# Altium PCB main.PcbDoc
Units mm, origin at the board's own origin, x right, y up, seen from the top; angles counter-clockwise.
Board outline 138.18 x 44.83 mm, 2 copper layers (Top Layer, Bottom Layer); 63 components, 61 nets, 232 pads, 22 vias.
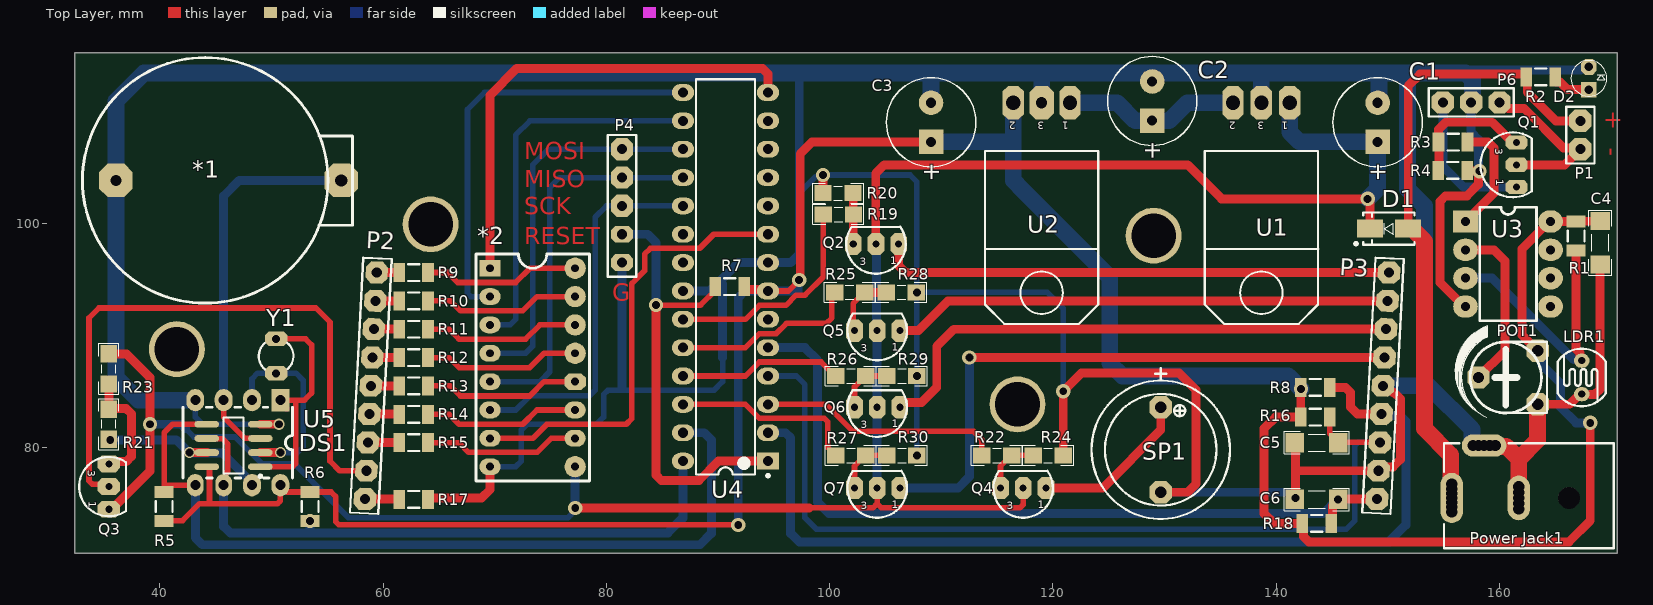
[diagram p0: Top Layer view]
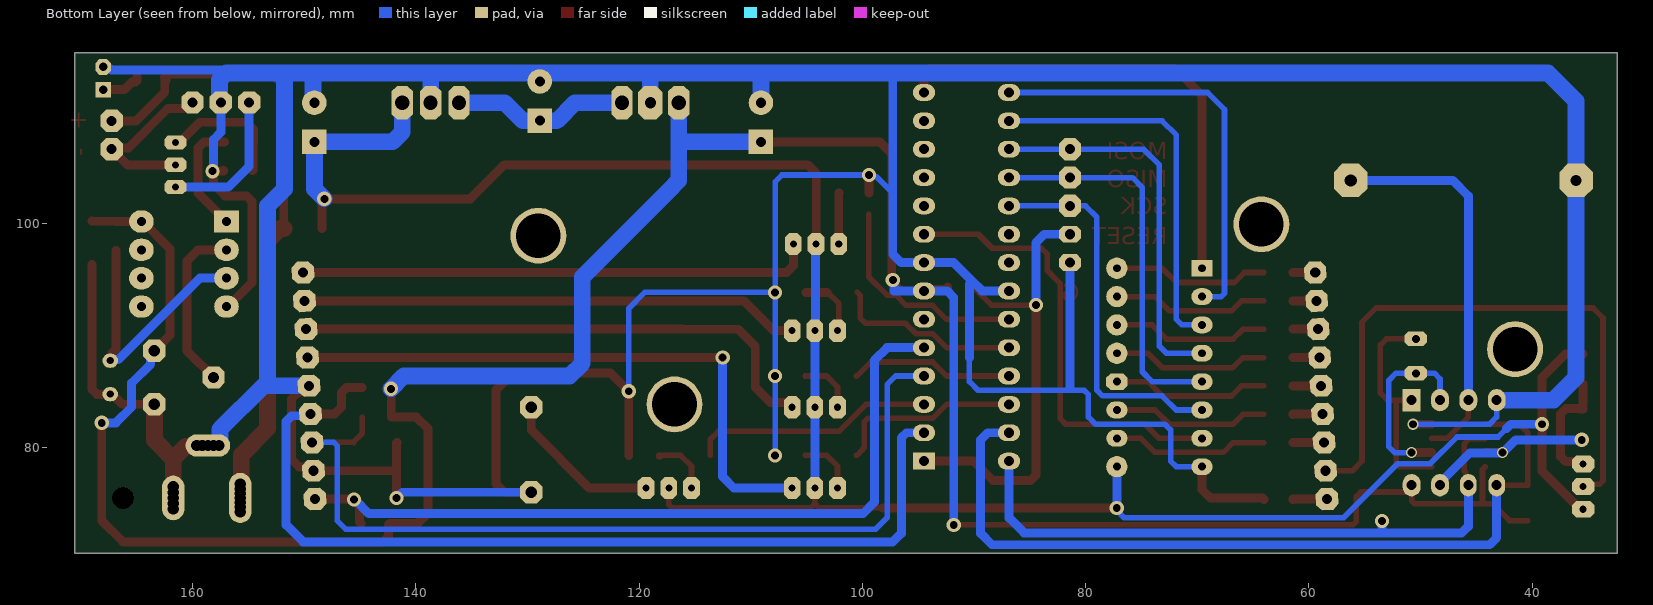
[diagram p1: Bottom Layer view, seen from below]
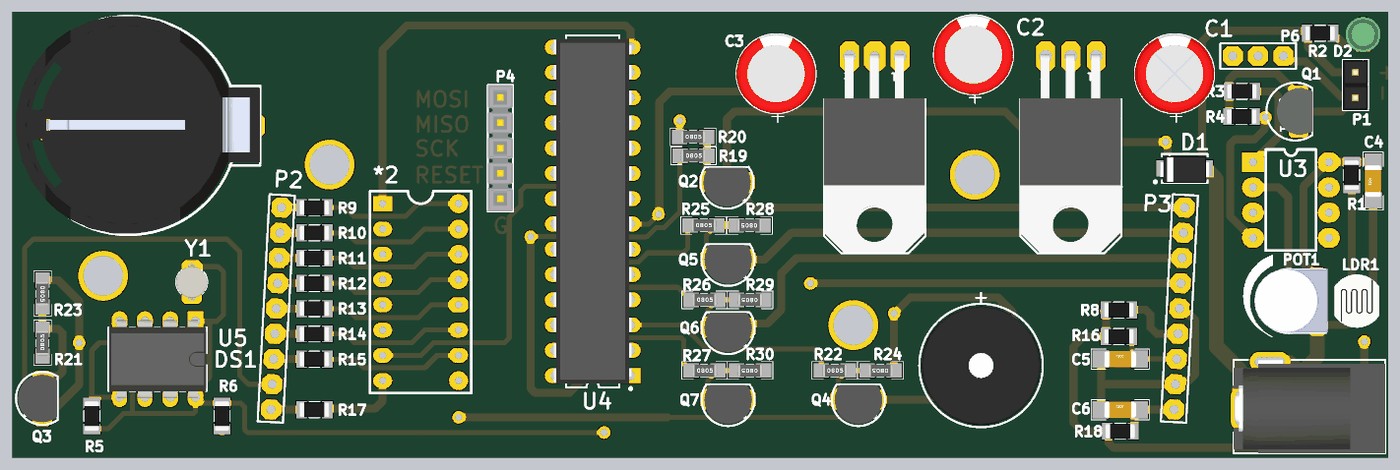
[diagram p2: 3D render of the assembled board from above, using the file's embedded part models]

## Layer stack, top to bottom
Top Solder: solder mask 0.0102, Solder Resist, Dk 3.5
Top Layer: signal copper 0.0356
Dielectric 1: dielectric 0.32, FR-4, Dk 4.8
Bottom Layer: signal copper 0.0356
Bottom Solder: solder mask 0.0102, Solder Resist, Dk 3.5

## Board outline
32.385,70.485 32.385,115.316 170.561,115.316 170.561,70.485

## Design rules (kind name [scope] priority, off if disabled: settings)
Clearance [All] p1: gap=0.254 ignorepadtopadclearanceinfootprint=FALSE except(0: Arc-Hole Track-Hole SMDPad-Hole THPad-Hole Via-Hole Fill-Hole Poly-Hole Region-Hole Text-Hole)
Height [All] p1 off: minheight=0 maxheight=25.4 prefheight=12.7
PolygonConnect [All] p1: connectstyle=Relief reliefconductorwidth=0.254 reliefentries=4 polygonreliefangle="90 Angle" airgapwidth=0.254
RoutingVias [All] p1: holewidth=0.711 width=1.27 viastyle="Through Hole" minholewidth=0.711 minwidth=1.27 maxholewidth=0.711 maxwidth=1.27
SolderMaskExpansion [All] p1: expansion=0.102 istentingtop=FALSE
Width [All] p1: maxlimit=1.5 minlimit=0.5 preferedwidth=0.8
29 further rules are at their usual default settings.

## Components (designator, comment, footprint, x,y, rotation, side; value= is the part's Value field where it differs from the comment)
*1 "BATTERY 3V 2032" batt 56.261,103.886 r180 top
*2 "ULN2003" ULN2003 69.596,96.012 r0 top
C1 "1000 μF" "WCAP-PTHT 8x11.5x3.5x0.6" 149.098,109.093 r90 top
C2 "470 μF" "WCAP-PTHT 8x8x3.5x0.6" 128.905,110.998 r90 top
C3 "470 μF" "WCAP-PTHT 8x8x3.5x0.6" 109.093,109.093 r90 top
C4 "0.1uF" CAPC4817X12N 169.037,98.298 r90 top
C5 "0.1uF" CAPC4817X12N 143.637,80.391 r0 top
C6 "0.1uF" CAPC4817X12N 143.637,75.311 r0 top
D1 "1n4007" DIOM4629X24N 150.114,99.568 r180 top
D2 "LED3MM" LED3mm_GRN 168.021,113.03 r90 top
DS1 "DS1307" DIP_8 46.99,80.391 r270 top
LDR1 "PhotoCell" PhotoCell 167.386,86.233 r90 top
P1 "Header 2" HDR1X2 167.259,109.22 r270 top
P2 "Header 9" HDR1X9 58.373,75.339 r87 top
P3 "Header 9" HDR1X9 149.051,75.339 r87 top
P4 "Header 5" HDR1X5 81.407,106.68 r270 top
P6 "Header 3" HDR1X3 154.94,110.871 r0 top
POT1 "10K" "POT 4" 160.782,86.233 r90 top
"Power Jack1" "Power Jack." "Power Jack." 166.227,75.385 r180 top
Q1 "C945" c945 161.544,105.283 r270 top
Q2 "C945" C945 104.156,98.187 r0 top
Q3 "C945" C945 35.433,76.454 r270 top
Q4 "C945" C945 117.348,76.327 r0 top
Q5 "C945" C945 104.267,90.424 r0 top
Q6 "C945" C945 104.267,83.566 r0 top
Q7 "C945" C945 104.267,76.327 r0 top
R1 "Resistor 0.25w" Resistor_SMD_1206 166.878,98.905 r90 top value=10K
R2 "Resistor 0.25w" Resistor_SMD_1206 163.703,113.157 r180 top value=1k
R3 "Resistor 0.25w" Resistor_SMD_1206 155.857,107.315 r180 top value=4.7k
R4 "Resistor 0.25w" Resistor_SMD_1206 155.829,104.775 r180 top value=10K
R5 "Resistor 0.25w" Resistor_SMD_1206 40.386,74.676 r270 top value=10K
R6 "Resistor 0.25w" Resistor_SMD_1206 53.467,74.676 r90 top value=10K
R7 "Resistor 0.25w" Resistor_SMD_1206 91.059,94.361 r0 top value=10K
R8 "Resistor 0.25w" Resistor_SMD_1206 143.51,85.344 r180 top value=10k
R9 "Resistor 0.25w" Resistor_SMD_1206 62.738,95.631 r0 top value=220R
R10 "Resistor 0.25w" Resistor_SMD_1206 62.738,93.091 r0 top value=220R
R11 "Resistor 0.25w" Resistor_SMD_1206 62.738,90.551 r0 top value=220R
R12 "Resistor 0.25w" Resistor_SMD_1206 62.738,88.011 r0 top value=220R
R13 "Resistor 0.25w" Resistor_SMD_1206 62.738,85.471 r0 top value=220R
R14 "Resistor 0.25w" Resistor_SMD_1206 62.738,82.931 r0 top value=220R
R15 "Resistor 0.25w" Resistor_SMD_1206 62.738,80.391 r0 top value=220R
R16 "Resistor 0.25w" Resistor_SMD_1206 143.51,82.677 r180 top value=10k
R17 "Resistor 0.25w" Resistor_SMD_1206 62.738,75.311 r0 top value=1K
R18 "Resistor 0.25w" Resistor_SMD_1206 143.637,73.152 r180 top value=10k
R19 "330R" RESC3413X04N 100.791,100.838 r0 top
R20 "10K" RESC3413X04N 100.758,102.743 r0 top
R21 "0R" RESC3413X04N 35.433,82.042 r90 top
R22 "2.2K" RESC3413X04N 114.982,79.248 r0 top
R23 "10K" RESC3413X04N 35.433,86.995 r270 top
R24 "10K" RESC3413X04N 119.587,79.248 r180 top
R25 "330R" RESC3413X04N 101.807,93.853 r0 top
R26 "330R" RESC3413X04N 101.901,86.36 r0 top
R27 "330R" RESC3413X04N 101.901,79.248 r0 top
R28 "10K" RESC3413X04N 106.426,93.853 r180 top
R29 "10K" RESC3413X04N 106.473,86.36 r180 top
R30 "10K" RESC3413X04N 106.473,79.248 r180 top
SP1 "" "BUZZER 7.62mm DC" 129.667,79.756 r270 top
U1 "L78XXCV" "78XXCV - Right"#1 138.684,110.843 r180 top
U2 "L78XXCV" "78XXCV - Right"#2 118.999,110.843 r180 top
U3 "LM358" DIP8E 156.972,100.203 r0 top
U4 "ATmega8A-PU" 28P3 90.678,95.25 r180 top
U5 "DS1307Z" SOIC8N_N 46.609,80.137 r180 top
Y1 "32.768KHz" "XTAL RTC" 50.419,88.138 r90 top value="12 MHz"

## Footprints (in the part's own frame and the unit in brackets; to place one, negate y for a bottom-side part, rotate by r counter-clockwise, add the part's x,y. Pads: shape width x height; smd on the part's side, far side on the other; paste and mask are expansions set on the pad)
28P3 [mm] "DIP, 28-Leads, Row Spacing 7.62mm, Pitch 2.54mm, Body 34.67x7.3mm"
  rect 2x1.5 hole 0.9: 1(-3.81,16.51)
  oval 2x1.5 hole 0.9: 2(-3.81,13.97) 3(-3.81,11.43) 4(-3.81,8.89) 5(-3.81,6.35) 6(-3.81,3.81) 7(-3.81,1.27) 8(-3.81,-1.27) 9(-3.81,-3.81) 10(-3.81,-6.35) 11(-3.81,-8.89) 12(-3.81,-11.43) 13(-3.81,-13.97) 14(-3.81,-16.51) 15(3.81,-16.51) 16(3.81,-13.97) 17(3.81,-11.43) 18(3.81,-8.89) 19(3.81,-6.35) 20(3.81,-3.81) 21(3.81,-1.27) 22(3.81,1.27) 23(3.81,3.81) 24(3.81,6.35) 25(3.81,8.89) 26(3.81,11.43) 27(3.81,13.97) 28(3.81,16.51)
  silkscreen extent -3.94,-17.7 2.65,17.93, body extent -3.95,-17.35 3.95,17.3, height 5.04
"78XXCV - Right"#1 [mm] "Right Angle"
  oct 1.905x3 hole 1.27: 1(-2.54,0) 2(2.54,0) 3(0,0)
  silkscreen extent -5.11,4.32 5.08,19.81, body extent -5.03,-0.2 5.13,19.71, height 4.44
"78XXCV - Right"#2 [mm] "Right Angle"
  oct 1.905x3 hole 1.27: 1(-2.54,0) 2(2.54,0)
  oct 2.2x3 hole 1: 3(0,0)
  silkscreen extent -5.11,4.32 5.08,19.81, body extent -5.03,-0.2 5.13,19.71, height 4.44
batt [mm]
  oct 3x3 hole 1.1: 1(0,0)
  oct 3x3 hole 1: 2(20.193,0)
  silkscreen extent -1.02,-11 23.19,11, body extent -0.98,-11.07 23.52,10.93, height 8.5
"BUZZER 7.62mm DC" [mm] "BUZZER 12mm DIA , 7.62mm pitch DESIGNER ABBAS BASEREH"
  oct 2x2 hole 1: 1(-3.81,0) 2(3.81,0)
  silkscreen extent -7.3,-6.2 6.2,6.2, body extent -6,-6 6,6, height 9.5
c945 [mm] "NPN Transistor"
  oct 1.27x2 hole 0.635: 1(2,0) 2(0,0) 3(-2,0)
  silkscreen extent -2.91,-3.23 2.91,1.37, body extent -2.4,-2.18 2.36,1.45, height 9.82
C945 [mm] "NPN Transistor"
  oct 1.5x2 hole 0.635: 1(2.032,0) 2(0,0) 3(-2.032,0)
  silkscreen extent -2.66,-2.66 2.66,1.54, body extent -2.39,-2.45 2.41,1.48, height 8
CAPC4817X12N [mm] "Chip Capacitor, 2-Leads, Body 4/80x1/70mm, IPC Medium Density-Design:Abbas Basereh"
  rect 1.65x1.75 smd: 1(-1.95,0) 2(1.95,0)
  silkscreen extent -2.92,-1.02 2.92,1.02, body extent -1.6,-0.8 1.6,0.8, height 1
DIOM4629X24N [mm] "Molded Diode, 2-Leads, Body 4/60x2/90mm, IPC Medium Density-Design:Abbas Basereh"
  rect 2.3x1.6 smd: 1(-1.7,0) 2(1.7,0)
  silkscreen extent -2.3,-1.45 3.07,1.47, body extent -2.5,-1.22 2.5,1.48, height 2.2
DIP8E [mm]
  rect 2.2x2 hole 0.8: 1(0,0)
  oval 2.2x2 hole 0.8: 2(0,-2.54) 3(0,-5.08) 4(0,-7.62) 5(7.62,-7.62) 6(7.62,-5.08) 7(7.62,-2.54) 8(7.62,0)
  silkscreen extent 1.27,-8.89 6.35,1.27
DIP_8 [mm]
  rect 2x1.6 hole 0.9: 1(-3.81,3.81)
  oval 2x1.6 hole 0.9: 2(-3.81,1.27) 3(-3.81,-1.27) 4(-3.81,-3.81) 7(3.81,1.27) 8(3.81,3.81)
  oval 2x1.5 hole 0.9: 5(3.81,-3.81) 6(3.81,-1.27)
  silkscreen extent -3.18,-4.9 3.18,4.9, body extent -3.94,-4.89 3.93,4.89, height 3.76
HDR1X2 [mm] "Connector; Header; 2 Position"
  oct 2x2 hole 0.9: 1(0,0) 2(2.54,0)
  silkscreen extent -1.27,-1.27 3.81,1.27, body extent -1.27,-1.28 3.81,1.26, height 8.79
HDR1X3 [mm] "Connector; Header; 3 Position"
  oct 2x2 hole 0.9: 1(0,0) 2(2.54,0) 3(5.08,0)
  silkscreen extent -1.27,-1.27 6.35,1.27
HDR1X5 [mm] "Connector; Header; 5 Position"
  oct 2x2 hole 0.9: 1(0,0) 2(2.54,0) 3(5.08,0)
  oct 1.5x2 hole 0.9: 4(7.62,0) 5(10.16,0)
  silkscreen extent -1.27,-1.27 11.43,1.27, body extent -1.28,-1.27 11.42,1.27, height 8.38
HDR1X9 [mm] "Connector; Header; 9 Position"
  oct 2x2 hole 0.9: 1(0,0) 2(2.54,0) 3(5.08,0) 4(7.62,0) 5(10.16,0) 6(12.7,0) 7(15.24,0) 8(17.78,0) 9(20.32,0)
  silkscreen extent -1.27,-1.27 21.59,1.27
LED3mm_GRN [mil]
  rect 55x55 hole 30: 1(-40,0)
  oct 55x55 hole 30: 2(40,0)
  silkscreen extent -63,-63 63,63, body extent -69,-69 69,69, height 154
PhotoCell [mm]
  oval 1.27x1.397 hole 0.635: 1(-1.5,0) 2(1.5,0)
  silkscreen extent -2.58,-2.15 2.58,2.15, body extent -2.61,-2.16 2.61,2.14, height 2.44
"POT 4" [mm] "Trimmer"
  oct 2x2 hole 1.016: 1(-2.4,-2.65) 2(2.4,-2.65) 3(0,2.65)
  silkscreen extent -3.58,-3.5 4.61,4.75, body extent -3.17,-3.66 3.23,3.69, height 4.75
"Power Jack." [mm]
  round 1.5 hole 1: 1(10.484,-1.303) 1(10.484,-0.853) 1(10.484,-0.453) 1(10.484,0.347) 1(10.484,0.747) 1(10.484,1.197) 2(4.484,-1.053) 2(4.484,0.947) 2(4.484,-0.553) 2(4.484,0.447) 3(6.584,-4.753) 3(7.084,-4.753) 3(8.084,-4.753) 3(8.584,-4.753)
  oval 2x4.5 hole 1: 1(10.484,-0.053)
  oval 2x4 hole 1: 2(4.484,-0.053)
  oval 4x2 hole 1: 3(7.584,-4.753)
  round 1.9 hole 2: MH(-0.016,-0.053)
  silkscreen extent -4.02,-4.95 11.18,4.45, body extent -4.02,-4.95 11.18,4.45, height 11
RESC3413X04N [mm] "Chip Resistor, 2-Leads, Body 3/40x1/30mm, IPC Medium Density-Design:Abbas Basereh"
  rect 1.55x1.45 smd: 1(-1.35,0) 2(1.35,0)
  silkscreen extent -2.29,-0.89 2.29,0.89, body extent -1.25,-0.62 1.25,0.62, height 0.79
Resistor_SMD_1206 [mm]
  rect 1.05x1.7 smd: 1(-1.298,0) 2(1.298,0)
  silkscreen extent -0.5,-0.75 0.5,0.75, body extent -1.52,-0.76 1.52,0.76, height 0.6
SOIC8N_N [mm] "SOIC, 8-Leads, Body 4.9x3.9mm, Pitch 1.27mm, IPC Medium Density"
  oval 2.2x0.6 smd: 1(-2.4,1.905) 2(-2.4,0.635) 3(-2.4,-0.635) 4(-2.4,-1.905) 5(2.4,-1.905) 6(2.4,-0.635) 7(2.4,0.635) 8(2.4,1.905)
  silkscreen extent -2.53,-2.5 0.9,2.88, body extent -2,-2.5 2,2.5, height 1.75
ULN2003 [mil]
  rect 75x59.06 hole 28: 1(-0.24,0.23)
  oval 75x59.06 hole 28: 2(-0.24,-99.77) 3(-0.24,-199.77) 4(-0.24,-299.77) 5(-0.24,-399.77) 6(-0.24,-499.77) 7(-0.24,-599.77) 8(-0.24,-699.77) 10(299.76,-599.77) 11(299.76,-499.77)
  round 75 hole 28: 9(299.76,-699.77) 13(299.76,-299.77) 14(299.76,-199.77) 15(299.76,-99.77) 16(299.76,0.23)
  oct 75x59.06 hole 28: 12(299.76,-399.77)
  silkscreen extent -50,-750 350,50
"WCAP-PTHT 8x8x3.5x0.6" [mm] "Polarized capacitors, Aluminum Polymer Capacitors, 2-Leads, Body 8x8x3.5x0.6"
  rect 2.2x2.2 hole 0.9: 1(-1.75,0)
  round 2.2 hole 0.9: 2(1.75,0)
  silkscreen extent -4,-4 4,4, body extent -3.97,-3.98 3.99,3.99, height 8.21
"WCAP-PTHT 8x11.5x3.5x0.6" [mm] "Polarized capacitors, Aluminum Polymer Capacitors, 2-Leads, Body 8x11.5x3.5x0.6"
  rect 2.2x2.2 hole 0.9: 1(-1.75,0)
  round 2.2 hole 0.9: 2(1.75,0)
  silkscreen extent -4,-4 4,4, body extent -3.97,-3.98 3.99,4, height 11.71
"XTAL RTC" [mm] "Crystal Oscillator"
  oct 1.3x2 hole 0.7: 1(-1.55,0) 2(1.55,0)
  silkscreen extent -1.17,-1.55 1.19,1.55, body extent -1.73,-1.6 1.72,1.6, height 8.98

## Part data
C1: library part "WCAP-PTHT 8x11.5x3.5x0.6 870135174006", "WCAP-PTHT Aluminum Polymer Capacitors , 1000 μF; + / - 20%; 6,3 V , 8 x 11,5", Manufacturer="Wurth Elektronik", partNo=870135174006, Application="Low voltage port filtering, appplid to high-end switching power supply, PC(desktop,laptop ),industrial computer, VGA card, server power, charger, TV, digital set-top box,DC-DC power module, game machine etc which consume large current with high speed circuit.", Capacitance="1000 μF", Characteristics="Aluminum Polymer Capacitors;Recommended soldering: Wave;Operating temperature: –55 °C to +125 °C;+125 °C product series;Low ESR at high frequency range;Long life: 2000 h @ +125 °C", ComponentLink1Description=Manufacturer, ComponentLink1URL=http://www.we-online.com, ComponentLink2Description=Datasheet, ComponentLink2URL=http://katalog.we-online.de/pbs/datasheet/870135174006.pdf, Created by="Karrer Zheng", Created Date=5/13/2015, E-mail=libraries@we-online.com
C2 C3: library part "WCAP-PTHT 8x8x3.5x0.6 870135174002", "WCAP-PTHT Aluminum Polymer Capacitors , 470 μF; + / - 20%; 6,3 V , 8 x 8", Manufacturer="Wurth Elektronik", partNo=870135174002, Application="Low voltage port filtering, appplid to high-end switching power supply, PC(desktop,laptop ),industrial computer, VGA card, server power, charger, TV, digital set-top box,DC-DC power module, game machine etc which consume large current with high speed circuit.", Capacitance="470 μF", Characteristics="Aluminum Polymer Capacitors;Recommended soldering: Wave;Operating temperature: –55 °C to +125 °C;+125 °C product series;Low ESR at high frequency range;Long life: 2000 h @ +125 °C", ComponentLink1Description=Manufacturer, ComponentLink1URL=http://www.we-online.com, ComponentLink2Description=Datasheet, ComponentLink2URL=http://katalog.we-online.de/pbs/datasheet/870135174002.pdf, Created by="Karrer Zheng", Created Date=5/13/2015, E-mail=libraries@we-online.com
C4 C5 C6: library part "CAP SMD 1206", "CAP 1206", Data=16-12-2016, Desc.="CAP SMD 1206", Designer="Abbas Basereh"
D1: library part "1n4007 SMD M7", "Standard Rectifiers", Manufacturer="DC COMPONENTS", Data=16-12-2016, Designer="Abbas Basereh", Link=http://www.tme.eu/en/details/m7/smd-universal-diodes/dc-components/, Part. No=M7
D2: library part "LED 3MM", "Light Emitting Diode", Designer="Ali Hafizi"
DS1: library part DS1307., LatestRevisionDate=17-Jul-2002, LatestRevisionNote="Re-released for DXP Platform.", Publisher="Altium Limited"
LDR1: library part LDR, "Photo Cell- Variable Resistor With Light", Company="IPA CO.", Designer="Saeid Jorablo", Last Update Time=2008/07/17
P1: "Header, 2-Pin", LatestRevisionDate=17-Jul-2002, LatestRevisionNote="Re-released for DXP Platform.", Publisher="Altium Limited"
P2 P3: "Header, 9-Pin", LatestRevisionDate=17-Jul-2002, LatestRevisionNote="Re-released for DXP Platform.", Publisher="Altium Limited"
P4: "Header, 5-Pin", LatestRevisionDate=17-Jul-2002, LatestRevisionNote="Re-released for DXP Platform.", Publisher="Altium Limited"
P6: "Header, 3-Pin", LatestRevisionDate=17-Jul-2002, LatestRevisionNote="Re-released for DXP Platform.", Publisher="Altium Limited"
POT1: library part POT, "Variable Resistor"
Q1: "NPN Silicon Epitaxial Planar Transistor", ComponentLink1Description="Manufacturer Link", ComponentLink1URL=http://www.taitroncomponents.com/, ComponentLink2Description=Datasheet, ComponentLink2URL=http://www.taitroncomponents.com/, DatasheetVersion=2017, LatestRevisionDate=2017, LatestRevisionNote="IPC-7351 Footprint Added.", PackageDescription="3-Pin SOT-23 Package 0.95 mm Pitch, 2.3 mm Lead Span", PackageReference=SOT23, PackageVersion=2017-2-8, Published=2017-2-8, Publisher="Abbas Basereh"
Q2 Q3 Q4 Q5 Q6 Q7: "NPN Transistor", Company="IPA CO", Designer="Saeid Jorablo", Last Update Time=2008/08/04
R1 R2 R3 R4 R5 R6 R7 R8 R9 R10 R11 R12 R13 R14 R15 R16 R17 R18: library part Resistor, LatestRevisionDate=17-Jul-2002, LatestRevisionNote="Re-released for DXP Platform.", Publisher="Altium Limited"
R19 R20 R21 R22 R23 R24 R25 R26 R27 R28 R29 R30: library part "RES 0805 0.125W", "RES 0805", Data=16-12-2016, Desc.="RES SMD 0805", Designer="Abbas Basereh"
SP1: library part "PIEZO BUZZER", "PIEZO BUZZER ACTIVE", Comment_1="SPEAKER AND BEEP", ComponentLink2Description=Reference, Design Date=1395/11/14, Designer="Abbas Basereh", Mounting Technology=THD, PackageDescription=THD, Pin Count=2, Publisher="Abbas Basereh", Status=Unreleased
U1 U2: "Fixed Voltage Regulator", Adding Date=1387/01/06, Company=ControTec, Designer="Saeid Jorablo"
U3: library part 1458
U4: "8-bit AVR Microcontroller, 8KB Flash, 512 Bytes EEPROM, 1KB SRAM, 28-pin PDIP, Industrial Grade (-40°C to 85°C)", Supplier Part Number 1=ATMEGA8A-PU-ND, ComponentLink1Description="Manufacturer Link", ComponentLink1URL=http://www.atmel.com/products/avr/default.asp?, ComponentLink2Description="ATmega8A Datasheet", ComponentLink2URL=http://www.atmel.com/dyn/resources/prod_documents/doc8159.pdf, ComponentLink3Description="ATmega8A Summary", ComponentLink3URL=http://www.atmel.com/dyn/resources/prod_documents/8159S.pdf, ComponentLink4Description="Atmel.com Home", ComponentLink4URL=http://www.atmel.com, DatasheetVersion=2017-1-5, PackageDescription="28-lead (0.300\"/7.62mm Wide) Plastic Dual Inline Package (PDIP)", PackageReference=28P3, PackageVersion=2017-1-5, Published=2017-1-5, Publisher="Abbas Basereh", Supplier 1=Digi-Key, Supplier 2=Farnell, Supplier 3=Mouser, Supplier Part Number 2=1748534, Supplier Part Number 3=556-ATMEGA8A-PU
U5: "64 X 8 Serial Real-Time Clock", Code_IPC=SOIC127P600-8, ComponentLink1Description="Manufacturer Link", ComponentLink1URL=http://www.maxim-ic.com/, ComponentLink2Description=Datasheet, ComponentLink2URL=http://pdfserv.maxim-ic.com/en/ds/DS1307.pdf, ComponentLink3Description="Discontinuation Notice", ComponentLink3URL=http://www.maxim-ic.com/qa/pdfs/non-obsolescence-letter.pdf, DatasheetVersion=10-Aug-1999, LatestRevisionDate=13-Apr-2006, LatestRevisionNote="IPC-7351 Footprint Added.", PackageDescription="8-Pin Small Outline Integrated Circuit 1.27 mm Pitch", PackageReference=SOIC8N, PackageVersion=1999, Published=13-Oct-2000, Publisher="Altium Limited"
Y1: library part XTAL, "XTAL Crystal", ComponentLink1Description=Datasheet, ComponentLink2Description=Reference, Design Date=2017-1-3, Designer="ABBAS BASEREH", Mounting Technology="Surface Mount\Through-Hole", Status=Unreleased

## Free pads (board coordinates)
  round 5 hole 4: 2(41.529,88.773) 2(64.262,99.949) 2(116.84,83.82) 2(129.032,98.933)

## Via types
v1: diameter 1.27, hole 0.711, Top Layer to Bottom Layer, 19 vias
v2: diameter 1, hole 0.711, Top Layer to Bottom Layer, 3 vias

## Nets (pads, with @x,y where several pads share a name; then routed paths per layer and width w, separated by ;. In a path a pad name is that pad's centre, name@x,y a point inside that pad or via, vN(x,y) a via of type N, cw(c..) or ccw(c..) an arc to the next point about the centre after c; other vN are vias at no path point)
2: P3.4 R8.1 U4.2 | length 85.4
  Top Layer w0.8: R8.1@144.822,85.33 R8.1 146.216,85.344 146.685,84.875 146.685,83.566 147.303,82.948 P3.4 P3.4@149.141,83.257
  Bottom Layer w0.8: U4.2 96.051,81.28 96.52,80.811 96.52,72.263 97.282,71.501 150.114,71.501 151.638,73.025 151.638,82.296 151.13,82.804 149.594,82.804 P3.4
12V: *2.9 C1.1 D1.2 Q2.2 Q3.1 Q4.2 Q5.2 Q6.2 Q7.2 R23.1 U1.1 | length 200.3
  Top Layer w0.5: 98.156,74.549 103.886,74.549 104.267,74.93 ; Q7.2 104.267,74.93 ; Q4.2 117.348,74.842 117.055,74.549 104.648,74.549 104.267,74.93
  Top Layer w0.8: Q3.1 35.701,74.422 39.116,77.837 v1(39.116,82.042) 39.116,86.233 37.004,88.345 R23.1 ; v1(77.216,74.549) 98.156,74.549 ; Q2.2@104.14,98.171 104.14,104.521 104.902,105.283 132.075,105.283 135.123,102.235 v1(148.209,102.235) 148.209,102.108 148.414,101.903 D1.2
  Bottom Layer w0.5: 42.291,81.661 43.053,80.899 46.736,80.899 49.137,78.498 52.058,78.498 56.896,73.66 76.561,73.66 76.853,73.953 76.853,73.978 77.216,74.341 v1(77.216,74.549)
  Bottom Layer w0.8: v1(39.116,82.042) 41.91,82.042 42.291,81.661 ; *2.9 77.21,74.555 v1(77.216,74.549) ; Q2.2@104.14,98.171 104.203,98.108 104.203,90.487 Q5.2 Q6.2 Q7.2
  Bottom Layer w1.5: U1.1 141.224,108.222 142.103,107.343 C1.1 149.098,103.124 v1(148.209,102.235)
12V1: "Power Jack1.1" D1.1 P1.1 R2.2 | length 57.5
  Top Layer w0.8: D1.1 151.842,99.596 151.842,112.345 152.908,113.411 162.28,113.411 R2.2@162.53,113.161 ; R2.2@162.405,112.832 R2.2 162.5,113.062 162.5,111.78 164.592,109.689 165.061,109.22 P1.1
  Top Layer w1.5: D1.1 152.164,99.568 153.289,98.443 153.289,81.658 155.647,79.3 155.647,76.688 155.647,76.238 155.647,75.534 155.743,75.438
A: *2.1 U4.14 | length 43.4
  Top Layer w0.8: *2.1 69.59,111.514 71.995,113.919 93.98,113.919 94.488,113.411 U4.14 U4.14@94.361,111.887
AO: *2.16 R9.2 | length 14.1
  Top Layer w0.5: R9.2 65.786,95.631 66.675,94.742 71.882,94.742 73.158,96.018 *2.16
AR: C5.2 P3.3 R16.1 U4.4 | length 81
  Top Layer w0.5: R16.1 144.808,81.22 145.587,80.441 C5.2 145.608,80.412 P3.3
  Bottom Layer w0.5: U4.4 97.028,86.36 97.79,85.598 97.79,73.66 98.806,72.644 146.304,72.644 147.066,73.406 147.066,80.119 147.359,80.412 P3.3
B: *2.2 U4.15 | length 38.5
  Bottom Layer w0.5: *2.2 67.857,93.478 67.564,93.771 67.564,110.236 69.088,111.76 U4.15
BO: *2.15 R10.2 | length 14.1
  Top Layer w0.5: R10.2 66.04,93.091 66.939,92.192 72.507,92.192 73.793,93.478 *2.15
BR: C6.2 P3.1 R18.1 U4.5 | length 71.1
  Top Layer w0.8: R18.1 145.06,73.277 145.06,74.734 145.542,75.216 v1(145.542,75.311) 145.556,75.325 149.037,75.325 P3.1
  Bottom Layer w0.8: U4.5 97.79,88.9 98.933,87.757 98.933,75.057 99.949,74.041 144.217,74.041 145.487,75.311 v1(145.542,75.311)
BUZZER: R22.1 U4.3 | length 21.9
  Top Layer w0.5: U4.3 99.681,83.82 102.094,81.407 112.903,81.407 113.632,80.678 R22.1
BUZZEROUT: Q4.1 SP1.1 | length 14.5
  Top Layer w0.8: Q4.1 124.46,76.327 129.667,81.534 SP1.1
C: *2.3 U4.16 | length 34.5
  Bottom Layer w0.5: *2.3 71.38,90.938 71.882,91.44 71.882,107.95 73.152,109.22 U4.16
C1: P3.9 Q2.1 | length 46.1
  Top Layer w0.8: Q2.1@106.172,98.171 106.172,96.266 106.807,95.631 115.697,95.631 P3.9
C2: P3.8 Q5.1 | length 44.8
  Top Layer w0.8: Q5.1 107.95,90.424 110.62,93.094 P3.8
C3: P3.7 Q6.1 | length 48.6
  Top Layer w0.8: Q6.1 106.299,83.641 106.649,83.991 108.249,83.991 109.601,85.343 109.601,89.027 111.125,90.551 116.078,90.551 116.085,90.558 P3.7
C4: P3.6 Q7.1 | length 54.6
  Top Layer w0.8: v1@112.405,88.021 P3.6
  Bottom Layer w0.8: Q7.1 111.506,76.327 112.522,77.343 v1(112.522,88.011)
CO: *2.14 R11.2 | length 14.1
  Top Layer w0.5: R11.2 65.913,90.551 66.802,89.662 72.771,89.662 74.047,90.938 *2.14
COM1: R19.1 U4.23 | length 19.7
  Top Layer w0.5: U4.23 92.465,91.44 93.719,92.694 96.091,92.694 97.008,93.611 97.802,93.611 99.441,95.25 R19.1
COM2: R25.1 U4.24 | length 16.8
  Top Layer w0.5: U4.24 92.456,88.9 93.71,90.154 95.225,90.154 96.142,91.071 99.707,91.071 100.203,91.567 100.203,93.599 R25.1
COM3: R26.1 U4.25 | length 14.7
  Top Layer w0.5: U4.25 92.456,86.36 93.71,87.614 99.247,87.614 100.501,86.36 R26.1
COM4: R27.1 U4.26 | length 17
  Top Layer w0.5: U4.26 92.465,83.82 93.719,82.566 99.529,82.566 99.822,82.273 99.822,79.977 100.026,79.773 100.026,79.723 100.501,79.248 R27.1
COMR: "Power Jack1.2" "Power Jack1.3" *1.2 *2.8 C1.2 C2.2 C3.2 C4.1 C5.1 C6.1 D2.2 DS1.4 LDR1.1 P3.2 P3.5 P4.5 P6.2 POT1.1 R4.1 R17.2 R20.1 R24.1 R28.1 R29.1 R30.1 SP1.2 U1.3 U2.3 U3.4 U4.8 U4.22 U5.4 | length 488.9
  Top Layer w0.8: U5.4 v2(50.673,82.042) ; R17.2 64.036,75.313 64.161,75.438 68.834,75.438 69.59,76.194 *2.8 ; R20.1 99.412,102.747 99.412,104.365 v1(99.416,104.369) ; R24.1 v1(120.937,84.996) 122.555,86.614 131.318,86.614 132.842,85.09 132.842,76.708 132.08,75.946 SP1.2 ; C5.1 141.732,80.346 141.732,78.105 ; v1(141.732,75.438) 141.732,78.105 ; P3.5 149.873,85.485 150.489,84.87 150.588,84.87 151.15,84.308 151.15,78.887 150.472,78.209 149.517,78.209 P3.2 141.962,77.875 141.732,78.105 ; 156.083,93.345 154.693,94.735 154.693,102.02 155.162,102.489 157.099,102.489 158.133,103.523 158.133,104.622 v1(158.223,104.712) 158.191,104.743 157.258,104.743 R4.1@157.226,104.775 ; POT1.1 166.295,83.833 167.195,84.733 LDR1.1 ; 168.148,84.709 168.568,84.709 169.037,85.178 C4.1
  Top Layer w1.5: 158.643,80.138 158.739,80.042 160.623,80.042 161.743,78.922 ; 161.743,75.438 161.743,76.438 161.743,78.922 ; POT1.1 163.432,80.611 161.743,78.922
  Bottom Layer w0.5: DS1.4 43.18,82.677 43.815,82.042 v2(50.673,82.042) ; *2.8 71.888,78.238 72.39,78.74 72.39,81.534 72.898,82.042 79.121,82.042 79.756,82.677 79.756,84.709 80.137,85.09 81.407,85.09 89.662,85.09 90.424,85.852 90.424,88.011 ; 97.282,102.743 98.761,104.222 99.269,104.222 v1(99.416,104.369) 107.213,104.369 107.823,103.759 v1(107.823,93.853) ; v1(107.823,79.248) v1(107.823,86.36) v1(107.823,93.853) ; v1(120.937,84.996) 120.937,92.423 119.507,93.853 v1(107.823,93.853)
  Bottom Layer w0.8: 81.407,85.344 P4.5 ; U4.22 89.281,93.98 90.17,94.869 ; 90.424,88.011 90.424,94.615 90.17,94.869 ; 97.282,113.514 97.282,102.743 97.282,97.282 96.52,96.52 U4.8 91.821,96.52 90.17,94.869 ; SP1.2 141.224,75.946 v1(141.732,75.438) v1@141.605,75.438 ; 156.968,113.514 157.246,113.792 167.285,113.792 167.355,113.862 167.837,113.862 D2.2 ; P6.2 157.48,108.204 158.133,107.551 158.133,104.801 v1(158.223,104.712)
  Bottom Layer w1.5: *1.2 36.068,86.233 38.1,84.201 DS1.4 ; *1.2@36.068,104.14 36.068,110.998 38.584,113.514 97.282,113.514 109.093,113.514 118.999,113.514 138.811,113.514 ; C3.2 109.093,113.387 ; U2.3 118.999,113.387 ; U1.3 138.684,113.387 138.811,113.514 ; C1.2 149.232,110.977 149.232,113.514 ; P3.5 153.656,85.485 ; P6.2@157.607,111.76 157.607,112.875 156.968,113.514 151.765,113.514 ; 157.643,80.138 158.143,80.138 158.643,80.138 ; 157.778,80.138 157.547,80.369 157.547,81.594 153.656,85.485 ; 138.811,113.514 149.232,113.514 ; 149.232,113.514 151.765,113.514 ; 151.765,113.514 151.765,103.124 153.289,101.6 153.289,85.852 153.656,85.485
D: *2.4 P4.1 U4.17 | length 34.4
  Bottom Layer w0.5: *2.4 72.777,88.398 73.406,89.027 73.406,105.283 74.803,106.68 P4.1 U4.17
DO: *2.13 R12.2 | length 14.1
  Top Layer w0.5: R12.2 65.913,88.011 66.812,87.112 73.142,87.112 74.428,88.398 *2.13
DOT: DS1.7 R21.1 U5.7 | length 16
  Top Layer w0.8: v2(42.672,79.502) U5.7
  Bottom Layer w0.8: v1(35.56,80.645) 41.475,80.645 42.618,79.502 v2(42.672,79.502) 42.71,79.464 45.577,79.464 48.26,76.781 DS1.7
DOTO: P2.2 Q3.2 | length 55.1
  Top Layer w0.5: Q3.2 35.218,76.669 33.948,76.669 33.655,76.962 33.655,91.567 34.544,92.456 53.975,92.456 55.245,91.186 55.245,78.74 56.11,77.875 P2.2
E: *2.5 P4.2 U4.18 | length 34.5
  Bottom Layer w0.5: *2.5 74.047,85.858 74.93,86.741 74.93,103.251 75.819,104.14 P4.2 U4.18
EO: *2.12 R13.2 | length 14.1
  Top Layer w0.5: R13.2 66.04,85.471 66.939,84.572 73.142,84.572 74.428,85.858 *2.12
F: *2.6 P4.3 U4.19 | length 33.9
  Bottom Layer w0.5: *2.6 71.888,83.318 73.152,84.582 78.486,84.582 78.994,85.09 78.994,100.584 80.01,101.6 P4.3 U4.19
FO: *2.11 R14.2 | length 14.1
  Top Layer w0.5: R14.2 65.913,82.931 66.802,82.042 72.517,82.042 73.793,83.318 *2.11
G: *2.7 U4.9 | length 40.4
  Top Layer w0.5: *2.7 73.412,80.778 74.676,82.042 81.788,82.042 82.296,82.55 82.296,94.651 83.439,95.794 83.439,97.282 83.947,97.79 87.519,97.79 87.535,97.806 88.372,97.806 89.626,99.06 U4.9
GO: *2.10 R15.2 | length 14.1
  Top Layer w0.5: R15.2 66.802,80.391 67.669,79.524 73.809,79.524 75.063,80.778 *2.10
LDR: LDR1.2 R1.1 U3.3 | length 23.6
  Top Layer w0.8: R1.1 166.878,88.773 167.233,88.418 167.233,87.886 LDR1.2
  Bottom Layer w0.8: U3.3 159.367,95.123 166.667,87.823 167.296,87.823 LDR1.2
NetC2_1: C2.1 U1.2 U2.1 | length 15.9
  Bottom Layer w1.5: U2.1 125.758,110.843 127.381,109.22 128.905,109.22 130.429,109.22 132.052,110.843 U1.2
NetD2_1: D2.1 R2.1 | length 3.7
  Top Layer w0.8: R2.1 165.001,112.832 165.126,112.707 165.423,112.707 166.116,112.014 D2.1
NetP1_2: P1.2 P6.3 Q1.2 | length 15.3
  Top Layer w0.8: P6.3 160.286,110.871 160.83,110.326 162.216,110.326 165.762,106.78 167.159,106.78 P1.2 165.862,105.283 Q1.2
NetP2_1: P2.1 R17.1 | length 3.1
  Top Layer w0.8: P2.1 58.386,75.325 61.426,75.325 R17.1
NetP2_3: P2.3 R15.1 | length 2.8
  Top Layer w0.8: P2.3 58.649,80.401 61.43,80.401 R15.1
NetP2_4: P2.4 R14.1 | length 2.7
  Top Layer w0.8: P2.4 58.78,82.94 61.431,82.94 R14.1
NetP2_5: P2.5 R13.1 | length 2.5
  Top Layer w0.8: P2.5 58.911,85.478 61.433,85.478 R13.1
NetP2_6: P2.6 R12.1 | length 2.4
  Top Layer w0.8: P2.6 59.042,88.016 61.435,88.016 R12.1
NetP2_7: P2.7 R11.1 | length 2.3
  Top Layer w0.8: P2.7 59.174,90.554 61.437,90.554 R11.1
NetP2_8: P2.8 R10.1 | length 2.1
  Top Layer w0.8: P2.8 P2.8 61.438,93.093 R10.1
NetP2_9: P2.9 R9.1 | length 2.4
  Top Layer w0.254: P2.9@59.078,95.631 P2.9
  Top Layer w0.8: P2.9 R9.1
NetP6_1: P6.1 Q1.1 | length 13.1
  Bottom Layer w0.8: P6.1 154.94,105.156 156.813,103.283 Q1.1
NetPOT1_3: POT1.3 U3.2 | length 15.4
  Top Layer w0.8: U3.2 159.512,97.663 160.528,96.647 160.528,88.629 POT1.3
NetQ1_3: Q1.3 R3.2 R4.2 | length 11.7
  Top Layer w0.8: R4.2@154.63,104.775 154.594,104.811 154.594,107.28 R3.2 154.559,108.458 155.194,109.093 159.369,109.093 161.179,107.283 Q1.3
NetQ2_3: Q2.3 R19.2 R20.2 | length 4.6
  Top Layer w0.8: Q2.3@102.108,98.171 Q2.3 102.124,100.838 102.124,102.727 R20.2
NetQ3_3: Q3.3 R21.2 R23.2 | length 10.3
  Top Layer w0.8: Q3.3 35.642,78.695 36.996,78.695 37.465,79.164 37.465,82.97 36.996,83.439 35.758,83.439 35.711,83.392 R21.2 ; R23.2 35.433,83.767 R21.2@35.442,83.758
NetQ4_3: Q4.3 R22.2 R24.2 | length 5.6
  Top Layer w0.5: Q4.3 115.316,78.282 116.282,79.248 R22.2 117.983,79.248 118.11,79.121 118.237,79.121 118.11,79.248 R24.2
NetQ5_3: Q5.3 R25.2 R28.2 | length 5
  Top Layer w0.5: Q5.3@102.108,91.186 102.108,92.854 103.107,93.853 R25.2
  Top Layer w0.8: R25.2 R28.2
NetQ6_3: Q6.3 R26.2 R29.2 | length 5.1
  Top Layer w0.5: Q6.3 102.235,85.394 103.201,86.36 R26.2 R29.2
NetQ7_3: Q7.3 R27.2 R30.2 | length 5.2
  Top Layer w0.5: Q7.3 102.235,78.282 103.201,79.248 R27.2 R30.2
NetR3_1: R3.1 U3.1 | length 10.3
  Top Layer w0.8: U3.1 157.072,100.203 157.672,100.803 157.672,100.903 159.512,102.743 159.512,106.807 159.004,107.315 R3.1
RESET: P4.4 R7.1 U4.1 | length 41.3
  Top Layer w0.5: v1(84.455,92.71) 88.435,92.71 89.761,94.036 R7.1
  Top Layer w0.8: v1(84.455,92.71) 84.455,77.469 84.924,77 88.303,77 90.043,78.74 U4.1
  Bottom Layer w0.8: P4.4 83.693,99.06 84.455,98.298 v1(84.455,92.71)
SCL: DS1.6 R6.1 U4.28 U5.6 | length 56.5
  Top Layer w0.5: U5.6 44.228,80.753 45.612,80.753 46.101,80.264 46.101,77.843 45.974,77.716
  Bottom Layer w0.8: DS1.6 45.72,72.898 46.317,72.301 53.467,72.301 ; v1(53.467,73.378) 53.467,72.301 ; U4.28 86.868,73.66 85.509,72.301 53.467,72.301
SDA: DS1.5 R5.1 U4.27 U5.5 | length 74.4
  Top Layer w0.5: DS1.5 40.386,76.581 40.386,81.28 41.148,82.042 U5.5
  Bottom Layer w0.8: DS1.5 43.18,71.882 43.815,71.247 88.392,71.247 89.408,72.263 89.408,80.645 88.773,81.28 U4.27
VB: *1.1 DS1.3 U5.3 | length 35
  Top Layer w0.5: DS1.3 45.72,82.677 47.625,80.772 U5.3
  Bottom Layer w0.8: DS1.3 45.72,102.489 47.117,103.886 *1.1
VCC: C3.1 C4.2 DS1.8 POT1.2 R1.2 R5.2 R6.2 R7.2 R8.2 R16.2 R18.2 U2.2 U3.8 U4.7 U5.8 | length 246.6
  Top Layer w0.5: R5.2@40.386,73.406 42.037,73.406 43.561,74.93 44.45,74.93 ; U5.8 44.45,77.991 44.45,74.93 ; v1(91.821,73.025) 56.046,73.025 55.753,73.318 55.753,75.565 55.344,75.974 R6.2 51.407,75.974 DS1.8 50.8,75.184 50.546,74.93 44.45,74.93
  Top Layer w0.8: R7.2 92.357,94.239 92.482,94.114 94.354,94.114 U4.7 ; v1(97.282,94.951) 97.372,95.041 97.372,106.262 98.425,107.315 109.065,107.315 C3.1 ; R8.2 R16.2 139.954,82.677 138.938,81.661 138.938,74.041 139.827,73.152 R18.2 142.464,73.027 142.464,71.97 142.933,71.501 166.243,71.501 168.148,73.406 v1(168.148,82.169) ; POT1.2 162.052,90.013 162.052,97.763 164.492,100.203 U3.8 164.606,100.217 R1.2@166.892,100.217 ; R1.2 R1.2@166.892,100.217 ; C4.2 169.015,100.225 166.9,100.225 R1.2@166.892,100.217
  Bottom Layer w0.8: v1(91.821,73.025) 91.821,93.384 92.417,93.98 U4.7 97.155,93.98 97.192,94.017 97.192,94.861 v1(97.282,94.951) v1@97.372,94.861 ; POT1.2@163.386,88.709 163.766,88.329 163.766,87.433 165.481,85.718 165.481,83.566 166.878,82.169 v1(168.148,82.169)
  Bottom Layer w1.5: C3.1 116.29,107.343 116.459,107.174 ; U2.2 116.459,107.174 ; v1(142.24,85.217) 141.097,86.36 126.238,86.36 125.095,87.503 125.095,95.24 117.338,102.997 116.459,103.876 116.459,107.174
X1: DS1.1 U5.1 Y1.2 | length 20.6
  Top Layer w0.5: U5.1 49.028,78.251 51.904,78.251 52.197,78.544 52.197,84.074 ; Y1.2 53.06,89.688 53.594,89.154 53.594,84.836 52.959,84.201 52.197,84.201 DS1.1 50.8,84.001 DS1.1@51.35,83.451
X2: DS1.2 U5.2 Y1.1 | length 17
  Top Layer w0.8: U5.2 v2(50.8,79.502)
  Bottom Layer w0.5: DS1.2 48.26,86.106 48.768,86.614 50.419,86.614 52.197,86.614 52.832,85.979 52.832,80.01 52.324,79.502 v2(50.8,79.502)
pads on no net: "Power Jack1.MH" U3.5 U3.6 U3.7 U4.6 U4.10 U4.11 U4.12 U4.13 U4.20 U4.21
copper on no net: | length 3.8
  Top Layer w0.5: 45.72,76.581 46.101,76.962 ; 89.761,94.333 89.761,94.361 ; 94.488,93.98 96.311,93.98 97.282,94.951
  Top Layer w0.8: 141.675,75.831 141.687,75.819

## Other copper
Top Layer:
  text "+" at 169.291,108.585 h1.52
  text "-" at 170.561,106.045 h1.52 r90
  text "MOSI" at 72.644,105.791 h1.52
  text "MISO" at 72.644,103.251 h1.52
  text "SCK" at 72.644,100.838 h1.52
  text "RESET" at 72.644,98.171 h1.52
  text "G" at 80.518,93.091 h1.52

## Silkscreen, mask and mechanical layers (free items; w line width, h text height)
Top Overlay:
Mechanical 13:
  lines w0.3: 167.132,115.316 170.561,115.316 ; 170.561,111.76 170.561,115.316 ; 170.561,115.316 32.385,115.316 32.385,70.485 170.561,70.485 170.561,115.316

## Text inside footprints (layer, text, board x,y; h text height)
C1: Top Overlay "+" at 149.835,103.768 h1.5 r90
C2: Top Overlay "+" at 129.642,105.673 h1.5 r90
C3: Top Overlay "+" at 109.83,103.768 h1.5 r90
Q1: Top Overlay "3" at 159.639,106.756 h0.7 r270; Top Overlay "1" at 159.734,103.988 h0.7 r270
Q2: Top Overlay "3" at 102.683,96.282 h0.7; Top Overlay "1" at 105.452,96.378 h0.7
Q3: Top Overlay "3" at 33.528,77.927 h0.7 r270; Top Overlay "1" at 33.623,75.159 h0.7 r270
Q4: Top Overlay "3" at 115.875,74.422 h0.7; Top Overlay "1" at 118.643,74.517 h0.7
Q5: Top Overlay "1" at 105.562,88.614 h0.7; Top Overlay "3" at 102.794,88.519 h0.7
Q6: Top Overlay "3" at 102.794,81.661 h0.7; Top Overlay "1" at 105.562,81.756 h0.7
Q7: Top Overlay "3" at 102.794,74.422 h0.7; Top Overlay "1" at 105.562,74.517 h0.7
U1: Top Overlay "3" at 138.938,109.143 h0.7 r180; Top Overlay "2" at 136.373,109.143 h0.7 r180; Top Overlay "1" at 141.097,109.143 h0.7 r180
U2: Top Overlay "3" at 119.253,109.143 h0.7 r180; Top Overlay "2" at 116.688,109.143 h0.7 r180; Top Overlay "1" at 121.412,109.143 h0.7 r180